# Altium PCB PCBcheck.PcbDoc
Units mm, origin at the board's own origin, x right, y up, seen from the top; angles counter-clockwise.
Board outline 50.8 x 74.93 mm, 2 copper layers (Top Layer, Bottom Layer); 23 components, 19 nets, 92 pads, 0 vias.
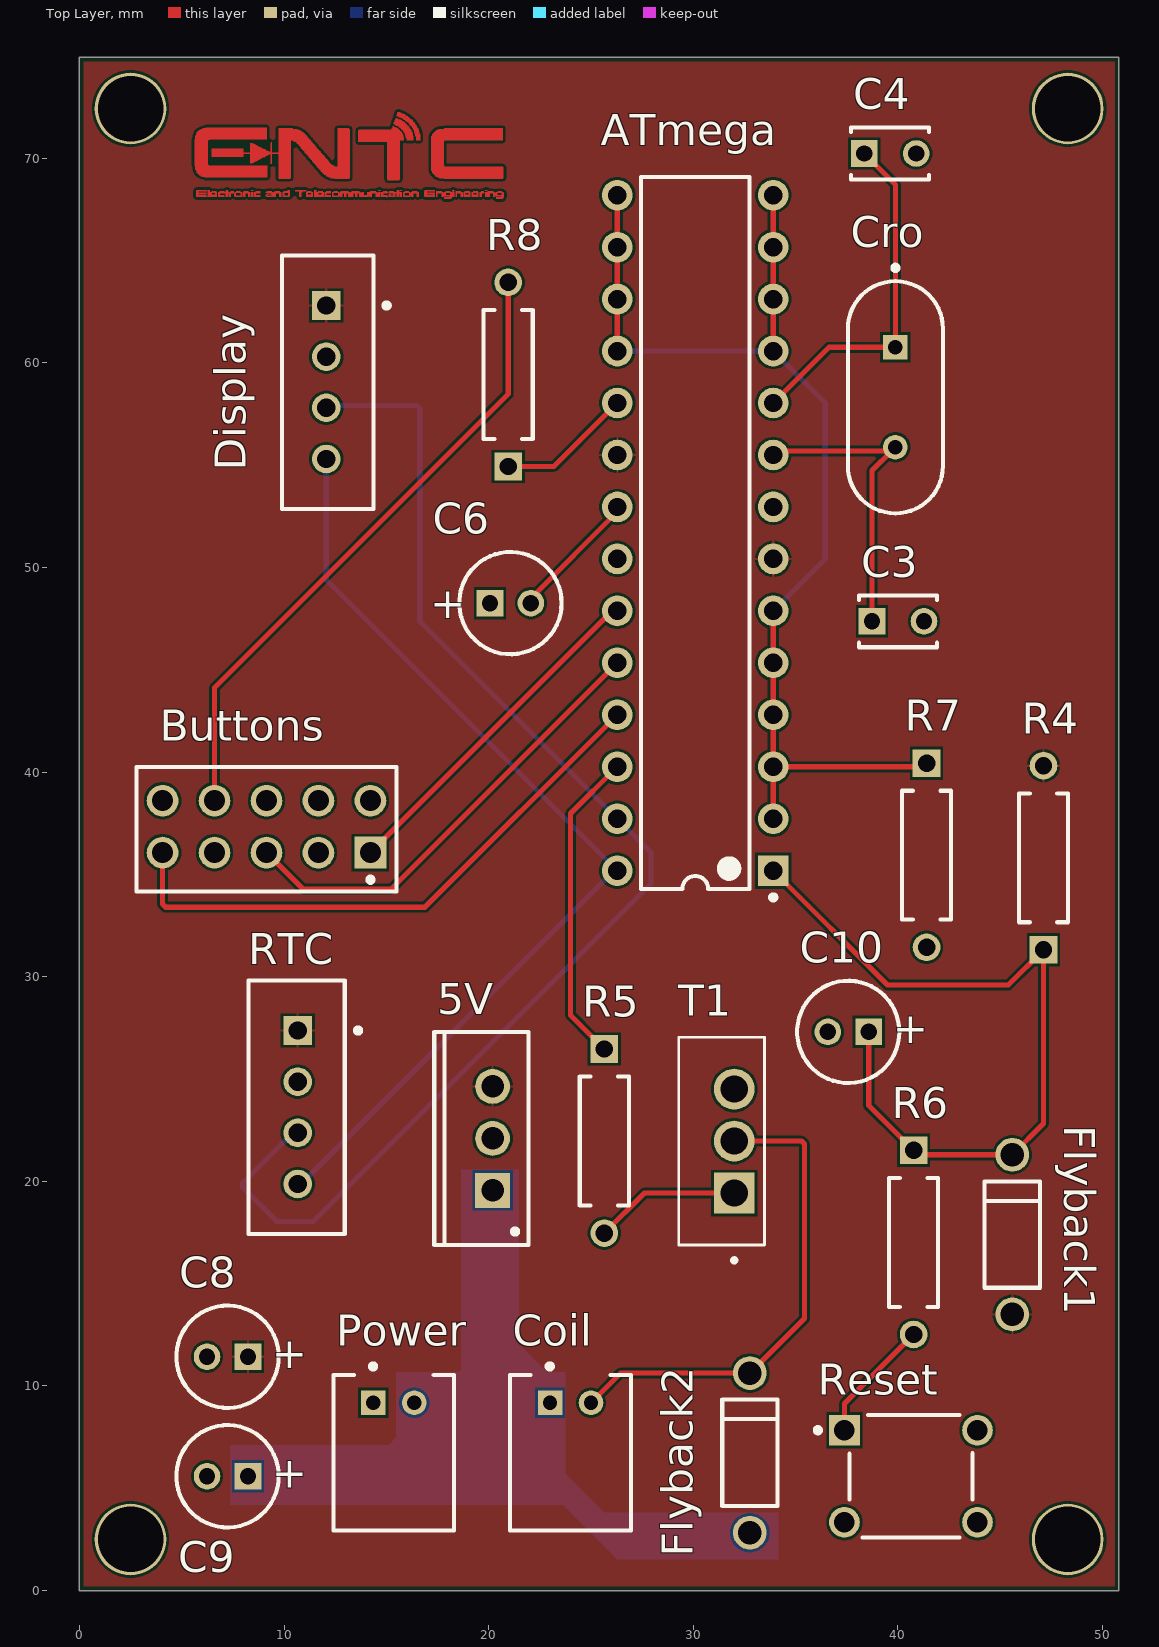
[diagram p0: Top Layer view]
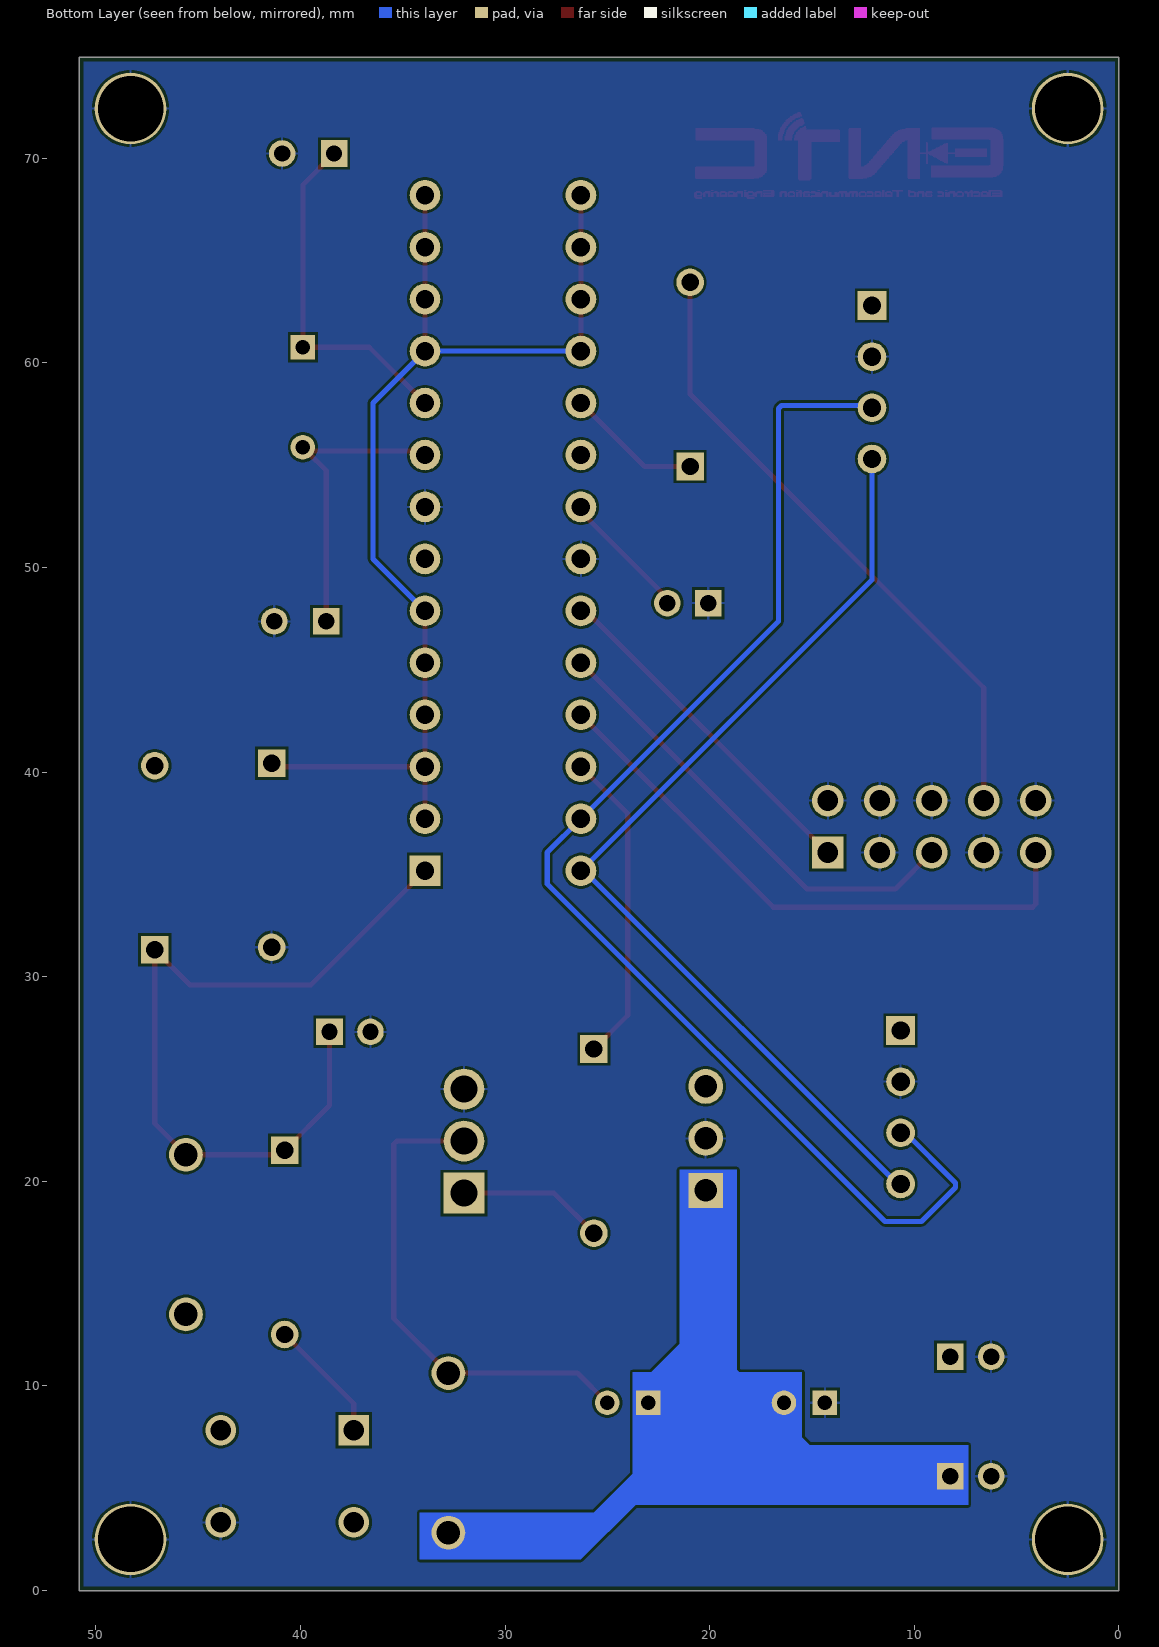
[diagram p1: Bottom Layer view, seen from below]

## Layer stack, top to bottom
Top Solder: solder mask 0.0102, Solder Resist, Dk 3.5
Top Layer: signal copper 0.0356
Dielectric 1: dielectric 0.32, FR-4, Dk 4.8
Bottom Layer: signal copper 0.0356
Bottom Solder: solder mask 0.0102, Solder Resist, Dk 3.5

## Board outline
0,0 50.8,0 50.8,74.93 0,74.93

## Design rules (kind name [scope] priority, off if disabled: settings)
BoardOutlineClearance [All] p1: gap=0.2 ignorepadtopadclearanceinfootprint=FALSE
Clearance [All] p1: gap=0.127 ignorepadtopadclearanceinfootprint=FALSE except(0.25: Arc-Hole Track-Hole SMDPad-Hole THPad-Hole Via-Hole Fill-Hole Poly-Hole Region-Hole Text-Hole)
ComponentClearance [All] p1: gap=0.127 collisioncheckmode=3 verticalgap=0.127 showdistances=TRUE
DiffPairsRouting [All] p1: maxlimit=0.254 minlimit=0.127 mostfreqgap=0.127 toplayer_minwidth=0.127 toplayer_maxwidth=25.4 toplayer_prefwidth=0.127 bottomlayer_minwidth=0.127 bottomlayer_maxwidth=25.4 bottomlayer_prefwidth=0.127 maxuncoupledlength=12.7
Height [All] p1: minheight=0 maxheight=1816.048 prefheight=12.7
HoleSize [All] p1: absolutevalues=TRUE maxlimit=6.3 minlimit=0.3 maxpercent=80.000 minpercent=20.000
HoleToHoleClearance [All] p1: gap=0.25 allowstackedmicrovias=FALSE
MinimumAnnularRing [All] p1: minimumring=0.076
MinimumSolderMaskSliver [All] p1: minsoldermaskwidth=0
PlaneClearance [All] p1: clearance=0.127
PlaneConnect PlaneConnectPowerPads [InPadClass('PowerPads')] p1: planeconnectstyle=Direct reliefexpansion=0.508 reliefentries=4 reliefconductorwidth=0.254 reliefairgap=0.254
PlaneConnect [All] p2: pad.planeconnectstyle=Relief pad.reliefexpansion=0.3 pad.reliefentries=4 pad.reliefconductorwidth=0.127 pad.reliefairgap=0.127 via.planeconnectstyle=Direct via.reliefexpansion=0.3 via.reliefentries=4 via.reliefconductorwidth=0.127 via.reliefairgap=0.127
PolygonConnect PolygonConnectPowerPads [All vs (InPadClass('PowerPads'))] p1: connectstyle=Direct reliefconductorwidth=0.254 reliefentries=4 polygonreliefangle="90 Angle" airgapwidth=0.254
PolygonConnect [All] p2: thpad.connectstyle=Relief thpad.reliefconductorwidth=0.127 thpad.reliefentries=4 thpad.polygonreliefangle="90 Angle" thpad.airgapwidth=0.127 smdpad.connectstyle=Relief smdpad.reliefconductorwidth=0.127 smdpad.reliefentries=4 smdpad.polygonreliefangle="90 Angle" smdpad.airgapwidth=0.127 via.connectstyle=Direct via.reliefconductorwidth=0.127 via.reliefentries=4 via.polygonreliefangle="90 Angle" via.airgapwidth=0.127
RoutingVias [All] p1: holewidth=0.3 width=0.6 viastyle="Through Hole" minholewidth=0.3 minwidth=0.6 maxholewidth=0.6 maxwidth=6.6
SilkToSilkClearance [All] p1: silktosilkclearance=0
SilkToSolderMaskClearance [IsPad] p1: minsilkscreentomaskgap=0.127 clearancetoexposedcopper=TRUE
SolderMaskExpansion [All] p1: expansion=0.075 istentingtop=FALSE
Width [All] p1: maxlimit=25.4 minlimit=0.127 preferedwidth=0.127 minimp=50.000000 maximp=50.000000 favimp=50.000000
20 further rules are at their usual default settings.

## Components (designator, comment, footprint, x,y, rotation, side; value= is the part's Value field where it differs from the comment)
5V "L7805CV" TO220 20.193,22.098 r90 top
ATmega "ATMEGA328P-PU" ATML-28P3 30.099,51.689 r180 top
Buttons "68021-210HLF" FCI-68021-210HLF-10_V 9.144,37.338 r180 top
C3 "22pF" KEMT-C315-THT-2 40.005,47.371 r0 top
C4 "22pF" KEMT-C315-THT-2 39.624,70.231 r0 top
C6 "ECA1HM100" CAPPR55-200-1100X500X1200 21.066,48.26 r0 top value=10µF
C8 "ECA1HM100" CAPPR55-200-1100X500X1200 7.239,11.43 r180 top value=10µF
C9 "ECA1HM100" CAPPR55-200-1100X500X1200 7.239,5.588 r180 top value=10µF
C10 "ECA1HM100" CAPPR55-200-1100X500X1200 37.576,27.305 r180 top value=10µF
Coil "S2B-PH-K-S(LF)(SN)" JST-S2B-PH-K-S_V 24.003,6.731 r0 top
Cro "FOXSLF/160-20" FOX-FOXSLF160-20 39.878,58.32 r270 top
Display "S4B-XH-A(LF)(SN)" JST-S4B-XH-A(LF)(SN)_V 12.065,59.055 r270 top
Flyback1 "1N4007" FAIR-DO-41-2 45.593,17.399 r90 top
Flyback2 "1N4007" FAIR-DO-41-2 32.766,6.731 r90 top
Power "S2B-PH-K-S(LF)(SN)" JST-S2B-PH-K-S_V 15.367,6.731 r0 top
R4 "MFR-25FBF52-10K" RESA60-630X240 47.117,35.814 r90 top value=10k
R5 "MFR-25FBF52-1K" RESA60-630X240 25.654,21.971 r270 top value=1k
R6 "MFR-25FBF52-221R" RESA60-630X240 40.767,17.018 r270 top value=221
R7 "MFR-25FBF52-10K" RESA60-630X240 41.402,35.941 r270 top value=10k
R8 "MFR-25FBF52-221R" RESA60-630X240 20.955,59.436 r90 top value=221
Reset "B3F-1000" OMRON-B3F-1000-4_V 40.64,5.588 r0 top
RTC "S4B-XH-A(LF)(SN)" JST-S4B-XH-A(LF)(SN)_V 10.668,23.622 r270 top
T1 "IRFZ44N" TO254P1016X419X2286-3 32.004,21.971 r90 top

## Footprints (in the part's own frame and the unit in brackets; to place one, negate y for a bottom-side part, rotate by r counter-clockwise, add the part's x,y. Pads: shape width x height; smd on the part's side, far side on the other; paste and mask are expansions set on the pad)
ATML-28P3 [mm] "DIP, 28-Leads, Body 34.8x7.2mm, Pitch 2.54mm"
  rect 1.5x1.5 hole 0.9: 1(-3.81,16.51)
  round 1.5 hole 0.9: 2(-3.81,13.97) 3(-3.81,11.43) 4(-3.81,8.89) 5(-3.81,6.35) 6(-3.81,3.81) 7(-3.81,1.27) 8(-3.81,-1.27) 9(-3.81,-3.81) 10(-3.81,-6.35) 11(-3.81,-8.89) 12(-3.81,-11.43) 13(-3.81,-13.97) 14(-3.81,-16.51) 15(3.81,-16.51) 16(3.81,-13.97) 17(3.81,-11.43) 18(3.81,-8.89) 19(3.81,-6.35) 20(3.81,-3.81) 21(3.81,-1.27) 22(3.81,1.27) 23(3.81,3.81) 24(3.81,6.35) 25(3.81,8.89) 26(3.81,11.43) 27(3.81,13.97) 28(3.81,16.51)
  silkscreen extent -3.94,-17.4 2.65,17.93, body extent -3.95,-17.4 3.95,17.4, height 4.58
CAPPR55-200-1100X500X1200 [mm] "THD, 2-Leads, Dia 5mm, Pin Spacing 2mm"
  rect 1.3x1.3 hole 0.8: 1(-1,0)
  round 1.3 hole 0.8: 2(1,0)
  silkscreen extent -2.5,-2.5 2.5,2.5, body extent -2.5,-2.5 2.45,2.5, height 12
FAIR-DO-41-2 [mm] "THD, 2-Leads, Body 5.2x2.72mm, Pin Spacing 7.8mm"
  round 1.65 hole 1.15: 1(-3.9,0) 2(3.9,0)
  silkscreen extent -2.6,-1.35 2.6,1.35, body extent -4.29,-1.17 4.29,1.17, height 2.35
FCI-68021-210HLF-10_V [mm] "THD, 10-Leads, Body 12.7x2.54mm, Pitch 2.54mm"
  rect 1.55x1.55 hole 1.02: 1(-5.08,1.27)
  round 1.55 hole 1.02: 2(-2.54,1.27) 3(0,1.27) 4(2.54,1.27) 5(5.08,1.27) 6(5.08,-1.27) 7(2.54,-1.27) 8(0,-1.27) 9(-2.54,-1.27) 10(-5.08,-1.27)
  silkscreen extent -6.35,-2.92 6.35,3.18, body extent -6.32,-11.13 6.32,1.64, height 4.83
FOX-FOXSLF160-20 [mm] "THD, 2-Leads, Body 11.35x4.65mm"
  rect 1.2x1.2 hole 0.7: 1(-2.44,0)
  round 1.2 hole 0.7: 2(2.44,0)
  silkscreen extent -6.45,-2.32 5.67,2.32, body extent -5.68,-2.33 5.68,2.33, height 3.6
JST-S2B-PH-K-S_V [mm] "THD, 2-Leads, Body 7.6x5.9mm, Pitch 2mm"
  rect 1.2x1.2 hole 0.7: 1(-1,2.45)
  round 1.2 hole 0.7: 2(1,2.45)
  silkscreen extent -2.95,-3.8 2.95,4.35, body extent -2.95,-3.8 2.95,3.8, height 4.8
JST-S4B-XH-A(LF)(SN)_V [mm] "Header, 4-Leads, Body 12.4x11.5mm, Pitch 2.5mm"
  rect 1.4x1.4 hole 0.9: 1(-3.75,0)
  round 1.4 hole 0.9: 2(-1.25,0) 3(1.25,0) 4(3.75,0)
  silkscreen extent -6.2,-2.16 6.2,3.08, body extent -6.2,-9.2 6.2,2.3, height 6.15
KEMT-C315-THT-2 [mm] "THD, 2-Leads, Body 3.81x2.54mm"
  rect 1.3x1.3 hole 0.8: 1(-1.27,0)
  round 1.3 hole 0.8: 2(1.27,0)
  silkscreen extent -1.91,-1.27 1.91,1.27, body extent -1.91,-1.27 1.91,1.27, height 4.66
OMRON-B3F-1000-4_V [mm] "TH, 4-Leads, Body 6x6mm"
  rect 1.5x1.5 hole 1 paste+0: 1(-3.25,2.25)
  round 1.5 hole 1 paste+0: 2(3.25,2.25) 4(3.25,-2.25)
  round 1.5 hole 1 paste+0 mask+0.102: 3(-3.25,-2.25)
  silkscreen extent -4.67,-3 3,3, body extent -3.4,-3 3.4,3, height 4.5
RESA60-630X240 [mm] "Axial Resistor, 2-Leads, Dia 2.4mm, Body Length 6.3mm"
  rect 1.35x1.35 hole 0.85: 1(-4.5,0)
  round 1.35 hole 0.85: 2(4.5,0)
  silkscreen extent -3.15,-1.2 3.15,1.2, body extent -4.77,-1.19 4.77,1.2, height 2.4
TO220 [mm] "TO, Thru-Hole, Vertical, Heatsink Mounted; 3 In-Line Leads; Pitch 2.54 mm"
  rect 1.7x1.7 hole 1.1: 1(-2.54,0)
  round 1.7 hole 1.1: 2(0,0) 3(2.54,0)
  silkscreen extent -5.2,-1.75 5.2,2.85, body extent -5.25,-1.8 5.25,2.9, height 19.7
TO254P1016X419X2286-3 [mm]
  rect 1.995x1.995 / inner round 1.995 / far side rect 1.995x1.995 hole 1.33: 1(-2.54,0)
  round 1.995 hole 1.33: 2(0,0) 3(2.54,0)
  silkscreen extent -5.93,-1.48 5.08,2.72, body extent -5.08,-1.47 5.08,2.72, height 22.86

## Part data
5V: library part CMP-019-00018-3, "Positive Voltage Regulator IC, 1.5 A, 5 V, 0 to 125 degC, 3-Pin TO-220, RoHS, Tube", Case/Package=TO-220, Dropout Voltage=2V, Manufacturer=STMicroelectronics, Max Input Voltage=35V, Max Operating Temperature=125°C, Max Ouput Current=1.5A, Max Supply Voltage=20V, Min Input Voltage=7V, Min Operating Temperature=0°C, Min Supply Voltage=8V, Nominal Output Voltage=5V, Package Quantity=50, Datasheet URL=https://datasheet.ciiva.com/15111/getdatasheetpartid-44136-15111027.pdf, Datasheet Version="Rev 30, 09/2012", Manufacturer URL=http://www.st.com/, Mounting Technology=TH, Output Current=1.5A, Output Voltage=5V, Outputs=1, Packaging=Rail/Tube, Pins=3, RoHS Compliant=True
ATmega: library part CMP-020-00004-3, "8-Bit Microcontroller with 32 KBytes In-System Programmable Flash, 23 I/Os, -40 to 85 degC, 28-Pin PDIP (28P3), RoHS, Tube", Case/Package=DIP, Manufacturer=Atmel, Max Clock Frequency=20MHz, Max Operating Temperature=85°C, Max Supply Voltage=5.5V, Min Operating Temperature=-40°C, Min Supply Voltage=1.8V, Package Description="28-Pin Plastic Dual Inline Package, Body 34.671 x 7.3025 mm, Pitch 2.54 mm", Package Quantity=14, Package Reference=28P3, Package Version="Rev. B, 09/2001", Datasheet URL=http://www.atmel.com/images/Atmel-8271-8-bit-AVR-Microcontroller-ATmega48A-48PA-88A-88PA-168A-168PA-328-328P_datasheet_Complete.pdf, Datasheet Version="Rev. 8271J, 11/2015", Density=32KB, Ethernet Channels=0, I/Os=23, Interface=USART, Manufacturer URL=http://www.atmel.com/, Mounting Technology=TH, Package URL=http://www.atmel.com/images/Atmel-8271-8-bit-AVR-Microcontroller-ATmega48A-48PA-88A-88PA-168A-168PA-328-328P_datasheet_Complete.pdf, Packaging=Rail/Tube, Pins=28, RAM Size=2KB, RoHS Compliant=True
Buttons: library part CMP-002-00020-2, "Male Header, Pitch 2.54 mm, 2 x 5 Position, Height 4.83 mm, Tail Length 3.05 mm, Bulk", Case/Package=68021-210HLF-10, Manufacturer="FCI Electronics", Package Description="Male Header, Pitch 2.54 mm, 2 x 5 Position, Height 4.83 mm, Tail Length 3.05 mm", Connector Type=Header, Datasheet URL=http://portal.fciconnect.com/Comergent//fci/drawing/68020.pdf, Datasheet Version="Rev. BM, 04/2015", Gender=Male, Manufacturer URL=http://portal.fciconnect.com/, Mounting Technology=TH, Package Reference=68021-210HLF-10, RoHS Compliant=Unknown
C3 C4: library part CMP-1664-00008-1, "Capacitor, Ceramic, 22 pF, +/-10 %, 100 V, -55 to 125 degC, 2-Pin THD, RoHS, Bulk", Case\Package=TO-220, Max Input Voltage="40 V", Max Operating Temperature="125 degC", Max Ouput Current="1.5 A", Min Input Voltage="4.2 V", Min Operating Temperature="0 degC", Output Voltage="1.2 V", Package Quantity=50, ComponentLink1Description="Manufacturer URL", ComponentLink1URL=http://www.kemet.com/, ComponentLink2Description=Datasheet, ComponentLink2URL=http://capacitoredge.kemet.com/capedge2/DataSheet/Datasheet-C315C220K1G5TA.pdf?pn=C315C220K1G5TA{BULK}, DatasheetVersion=Aug-16, Height="9.28 mm", Length="10.28 mm", Mount="Through Hole", Output Current="1.5 A", Outputs=1, PackageDescription="2-Pin Through Hole Device, Body 3.81 x 2.54 mm", PackageReference=C315-THT-2, Packaging=Rail/Tube, Pins=3, Radiation Hardening=No, REACH SVHC="No SVHC", RoHSCompliant=true, Weight="0.08113 oz", Width="4.82 mm"
C6 C8 C9 C10: library part CMP-001-00025-7, "Aluminum Electrolytic Capacitor, 10 uF, +/- 20%, 50 V, -40 to 85 degC, 2-Pin THD, RoHS, Bulk", Capacitor Type=Electrolytic, Case/Package=Radial, Manufacturer=Panasonic, Max Operating Temperature=85°C, Min Operating Temperature=-40°C, Package Description="2-Pin Radial Lead, Dia 5 mm, Height 12 mm", Package Quantity=200, Package Reference=CAPPR55-200-1100X500X1200, Ripple Current=65mA, Tolerance=20%, Voltage Rating=50V, Datasheet URL=https://industrial.panasonic.com/cdbs/www-data/pdf/RDF0000/ABA0000C1218.pdf, Datasheet Version="Rev. 05, 10/2016", Diameter=5mm, Lead Pitch=2mm, Manufacturer URL=http://www.panasonic.com/, Mounting Technology=TH, Packaging=Bulk, Pins=2, Ripple Current (AC)=65mA, RoHS Compliant=True
Coil Power: library part CMP-002-00030-2, "Male Header, Pitch 2 mm, 1 x 2 Position, Height 4.8 mm, Tail Length 3.4 mm, -25 to 85 degC, RoHS, Bulk", Case/Package=S2B-PH-K-S, Manufacturer="Japan Solderless Terminals", Max Operating Temperature=85°C, Min Operating Temperature=-25°C, Package Description="Male Header, Pitch 2 mm, 1 x 2 Position, Height 4.8 mm, Tail Length 3.4 mm", Connector Type=Header, Datasheet URL=http://www.jst-mfg.com/product/pdf/eng/ePH.pdf, Datasheet Version=Dec-12, Gender=Male, Mounting Technology=SM, Package Reference=S2B-PH-K-S, RoHS Compliant=Unknown
Cro: library part CMP-003-00027-2, "Resistance Weld Thru-Hole Crystal, 16 MHz, +/- 30 ppm, 20 pF, -20 to 70 degC, 2-Pin THD, RoHS, Bulk", Case/Package=FOXSLF160-20, Frequency=16MHz, Frequency Tolerance=30ppm, Load Capacitance=20pF, Manufacturer="FOX Electronics", Max Operating Temperature=70°C, Min Operating Temperature=-20°C, Package Description="2-Pin Through Hole Device, Body 11.35 x 4.65 mm", Package Quantity=100, Resistance=40Ohm, Tolerance=50ppm, Datasheet URL=http://www.foxonline.com/pdfs/hc49slf.pdf, Datasheet Version=Mar-15, ESR=40, Manufacturer URL=http://www.foxonline.com/, Mounting Technology=TH, Package Reference=FOXSLF160-20, Packaging=Bulk, Pins=2, RoHS Compliant=True
Display RTC: library part CMP-002-00034-2, "Male Header, Pitch 2.5 mm, 1 x 4 Position, Height 6.1 mm, Tail Length 3.4 mm, -25 to 85 degC, RoHS, Bulk", Manufacturer=JST, Max Operating Temperature=85°C, Min Operating Temperature=-25°C, Package Description="XH Series Disconnectable Crimp Style Connector, Pitch 2.5 mm, 1 x 4 Position, Height 6.1 mm, Tail Length 3.4 mm", Case/Package=S4B-XH-A(LF)(SN), Connector Type=Header, Datasheet URL=http://www.jst-mfg.com/product/pdf/eng/eXH.pdf, Datasheet Version=May-16, Gender=Male, Manufacturer URL=http://www.jst.com/home2.html, Mounting Technology=TH, Package Reference=S4B-XH-A(LF)(SN), RoHS Compliant=Unknown
Flyback1 Flyback2: library part CMP-004-00007-2, "General Purpose Rectifier, 1.1 V, 1.0 A, -55 to 175 degC, 2-Pin DO-41, RoHS, Tape and Reel", Case/Package=DO-41-2, Forward Current=1A, Forward Voltage=1.1V, Manufacturer=Fairchild, Max Operating Temperature=175°C, Max Surge Current=30A, Min Operating Temperature=-55°C, Package Description="2-Pin Axial Lead, Dia 2.375 mm, Body Length 4.63 mm", Package Quantity=5000, Package Version="Rev. 2, 09/2008", Peak Reverse Current=5uA, Datasheet URL=https://www.fairchildsemi.com/datasheets/1N/1N4007.pdf, Datasheet Version="Rev. 1.1.0, 11/2014", Elements=1, Manufacturer URL=https://www.fairchildsemi.com/, Mounting Technology=TH, Package Reference=DO-41-2, Package URL=http://www.fairchildsemi.com/dwg/DO/DO41A.pdf, Packaging=TapeandReel, Pins=2, RoHS Compliant=True
R4 R7: library part CMP-009-00047-4, "Axial Resistor, 10 KOhm, +/- 1%, 0.25 W, -55 to 155 degC, 2-Pin THD, RoHS, Bulk", Case/Package=Axial, Manufacturer=Yageo, Max Operating Temperature=155°C, Min Operating Temperature=-55°C, Package Description="2-Pin Axial Lead, Dia 2.4 mm, Body Length 6.3 mm", Package Quantity=200, Package Reference=MFR-25, Power=250mW, Tolerance=1%, Voltage Rating=250V, Datasheet URL=http://www.yageo.com/documents/recent/Yageo%20LR_MFR_2013.pdf, Datasheet Version=Apr-13, Manufacturer URL=http://www.yageo.com/, Mounting Technology=TH, Packaging=Bulk, RoHS Compliant=True
R5: library part CMP-009-00048-4, "Axial Resistor, 1 KOhm, +/- 1%, 250 mW, -55 to 155 degC, 2-Pin THD, RoHS, Bulk", Case/Package=Axial, Manufacturer=Yageo, Max Operating Temperature=155°C, Min Operating Temperature=-55°C, Package Description="2-Pin Axial Lead, Dia 2.4 mm, Body Length 6.3 mm", Package Quantity=200, Package Reference=MFR-25, Power=250mW, Tolerance=1%, Voltage Rating=250V, Composition=CarbonFilm, Datasheet URL=http://www.yageo.com/documents/recent/Yageo%20LR_MFR_2013.pdf, Datasheet Version=Apr-13, Manufacturer URL=http://www.yageo.com/, Mounting Technology=TH, Packaging=Bulk, RoHS Compliant=True
R6 R8: library part CMP-009-00051-4, "Axial Resistor, 221 Ohm, +/- 1%, 250 mW, -55 to 155 degC, 2-Pin THD, RoHS, Bulk", Case/Package=Axial, Manufacturer=Yageo, Max Operating Temperature=155°C, Min Operating Temperature=-55°C, Package Description="2-Pin Axial Lead, Dia 2.4 mm, Body Length 6.3 mm", Package Quantity=200, Package Reference=MFR-25, Power=250mW, Tolerance=1%, Voltage Rating=250V, Datasheet URL=http://www.yageo.com/documents/recent/Yageo%20LR_MFR_2013.pdf, Datasheet Version=Apr-13, Manufacturer URL=http://www.yageo.com/, Mounting Technology=TH, Packaging=Bulk, RoHS Compliant=True
Reset: library part CMP-011-00004-2, "Tactile Switch, SPST-NO, 0.05 A, 24 V, -25 to 70 degC, 4-Pin THD, RoHS, Bulk", Contact Current Rating=50mA, Manufacturer="Omron Electronic Components", Max Contact Resistance=100mohm, Max Operating Temperature=70°C, Max Voltage Rating (DC)=24V, Min Operating Temperature=-25°C, Operating Force=100gf, Package Description="4-Pin Through Hole Device, Body 6 x 6 mm", Package Quantity=1500, Resistance=0.1Ohm, Case/Package=B3F-1000, Contact Material=Gold, Contact Plating=Gold, Current Rating=50mA, Datasheet URL=http://www.omron.com/ecb/products/pdf/en-b3f.pdf, Datasheet Version=Jan-15, Manufacturer URL=http://www.omron.com/, Max Current Rating=50mA, Mounting Technology=TH, Package Reference=B3F-1000, Packaging=Bulk, Pins=4, RoHS Compliant=True, Throw Configuration=SPST, Voltage Rating=24V, Voltage Rating (DC)=24V
T1: library part CMP-007-000000-1, "N-Channel 55 V 49A (Tc) 94W (Tc) Through Hole TO-220AB", Package="TO-220-3 Infineon", Availability="In Stock", Check_prices=https://www.snapeda.com/parts/IRFZ44N/Infineon+Technologies/view-part/?ref=eda, Component Type=Standard, Design Item ID=IRFZ44N, MF="Infineon Technologies", MP=IRFZ44N, Pin Count=3, Price=None, Purchase-URL=https://pricing.snapeda.com/search/part/IRFZ44N/?ref=eda, SnapEDA_Link=https://www.snapeda.com/parts/IRFZ44N/Infineon+Technologies/view-part/?ref=snap, Source=IRFZ44N.SchLib

## Free pads (board coordinates)
  round 3.5 hole 3.2: 1(2.5,2.5) 1(2.5,72.43) 1(48.3,2.5) 1(48.3,72.43)

## Nets (pads, with @x,y where several pads share a name; then routed paths per layer and width w, separated by ;. In a path a pad name is that pad's centre, name@x,y a point inside that pad or via, vN(x,y) a via of type N, cw(c..) or ccw(c..) an arc to the next point about the centre after c; other vN are vias at no path point)
+5: 5V.3 ATmega.7 ATmega.20 C8.1 Display.1 Flyback1.1 R4.2 RTC.1
+12: 5V.1 C9.1 Coil.1 Flyback2.1 Power.2
Alarm: ATmega.25 Buttons.5 | length 28.7
  Top Layer w0.254: Buttons.5 4.064,33.55 4.213,33.401 16.891,33.401 ATmega.25
"Control Signal": ATmega.26 R5.1 | length 15.4
  Top Layer w0.254: R5.1 24.003,28.122 24.003,37.973 ATmega.26
GND: 5V.2 ATmega.8 ATmega.22 Buttons.2 Buttons.4 Buttons.6 Buttons.8 Buttons.9 Buttons.10 C3.2 C4.2 C6.1 C8.2 C9.2 C10.2 Display.2 pad.1 Power.1 R7.2 Reset.4 RTC.2 T1.3
Hours: ATmega.23 Buttons.1 | length 17
  Top Layer w0.254: Buttons.1 26.035,47.879 ATmega.23
LED: Buttons.7 R8.2 | length 31.3
  Top Layer w0.254: Buttons.7 6.604,44.124 20.955,58.475 R8.2
Minutes: ATmega.24 Buttons.3 | length 22.5
  Top Layer w0.254: Buttons.3 10.922,34.29 15.24,34.29 ATmega.24
NetATmega_2: ATmega.2 ATmega.3 ATmega.4 ATmega.5 ATmega.6 ATmega.11 ATmega.12 ATmega.13 ATmega.14 ATmega.15 ATmega.16 ATmega.17 ATmega.18 R7.1 | length 55.4
  Top Layer w0.254: ATmega.18 ATmega.17 ATmega.16 ATmega.15 ; ATmega.2 ATmega.3 ; ATmega.6 ATmega.5 ATmega.4 ATmega.3 ; ATmega.11 ATmega.12 ATmega.13 ATmega.14 ; R7.1 41.22,40.259 ATmega.3
  Bottom Layer w0.254: ATmega.18 ATmega.11 36.449,58.039 36.449,50.419 ATmega.6
NetATmega_9: ATmega.9 C3.1 Cro.2 | length 14.9
  Top Layer w0.254: ATmega.9 34.109,55.699 Cro.2@39.697,55.699 ; C3.1 38.735,54.737 Cro.2@39.697,55.699 ; Cro.2 Cro.2@39.697,55.699
NetATmega_10: ATmega.10 C4.1 Cro.1 | length 17.2
  Top Layer w0.254: ATmega.10 36.63,60.76 Cro.1 39.878,68.707 C4.1
NetATmega_21: ATmega.21 C6.2 | length 6.4
  Top Layer w0.254: C6.2 22.066,48.498 26.289,52.721 ATmega.21
NetCoil_2: Coil.2 Flyback2.2 T1.2 | length 24.2
  Top Layer w0.254: Coil.2 26.453,10.631 Flyback2.2 35.433,13.298 35.433,21.822 35.284,21.971 T1.2
NetR5_2: R5.2 T1.1 | length 7.2
  Top Layer w0.254: R5.2 27.614,19.431 T1.1
NetR6_2: R6.2 Reset.1 | length 6.1
  Top Layer w0.254: Reset.1 37.39,9.141 R6.2
ON: ATmega.19 R8.1 | length 6.6
  Top Layer w0.254: R8.1 23.186,54.936 ATmega.19
Reset: ATmega.1 C10.1 Flyback1.2 R4.1 R6.1 | length 38.5
  Top Layer w0.254: ATmega.1 39.497,29.591 45.394,29.591 R4.1 47.117,22.823 Flyback1.2 40.986,21.299 R6.1 38.576,23.709 C10.1
SCL: ATmega.28 Display.4 RTC.4 | length 48
  Bottom Layer w0.254: RTC.4 10.825,19.872 26.132,35.179 ATmega.28 12.065,49.403 Display.4
SDA: ATmega.27 Display.3 RTC.3 | length 64.1
  Bottom Layer w0.254: RTC.3@10.805,22.372 RTC.3 10.434,22.372 7.979,19.917 7.979,19.707 9.652,18.034 11.43,18.034 27.94,34.544 27.94,36.068 ATmega.27 16.637,47.371 16.637,57.763 16.488,57.912 12.172,57.912 Display.3
pads on no net: Reset.2 Reset.3

## Polygon pours and split planes (outlines as drawn)
GND on Bottom Layer "GND_L02_P003" (solid, pour order 3): 0,0 50.8,0 50.8,74.93 0,74.93
+5 on Top Layer "bottom layer-GND" (solid, pour order 1): 0.127,74.93 50.546,74.93 50.8,74.676 50.8,0 -0.127,0

## Other copper
Top Layer:
  region: 19.925,68.412 19.827,68.412 19.827,68.445 19.925,68.445
  region: 14.682,68.445 14.715,68.445 14.715,68.412 14.617,68.412 14.617,68.445 14.65,68.445
  region: 8.424,68.412 8.391,68.412 8.391,68.445 8.49,68.445 8.49,68.412 8.457,68.412
  region: 15.665,68.412 15.665,68.445 15.764,68.445 15.764,68.412 15.698,68.412
  region: 18.319,68.412 18.221,68.412 18.221,68.445 18.319,68.445
  region: 18.221,68.118 18.221,68.347 18.254,68.347 18.254,68.38 18.287,68.38 18.287,68.347 18.319,68.347 18.319,68.118 18.254,68.118
  region: 19.827,68.281 19.827,68.347 19.925,68.347 19.925,68.118 19.827,68.118 19.827,68.249
  region: 16.419,68.281 16.321,68.281 16.321,68.118 16.222,68.118 16.222,68.347 16.255,68.347 16.255,68.38 16.517,68.38 16.517,68.347 16.583,68.347 16.583,68.118 16.485,68.118 16.485,68.281 16.452,68.281
  region: 6.262,68.281 6.262,68.445 6.36,68.445 6.36,68.118 6.262,68.118 6.262,68.249
  region: 18.385,68.118 18.385,68.38 18.647,68.38 18.647,68.347 18.713,68.347 18.713,68.314 18.745,68.314 18.745,68.118 18.647,68.118 18.647,68.281 18.451,68.281 18.451,68.118 18.418,68.118
  region: 14.617,68.249 14.617,68.347 14.715,68.347 14.715,68.118 14.617,68.118 14.617,68.216
  region: 16.091,68.347 16.157,68.347 16.157,68.314 16.19,68.314 16.19,68.15 16.157,68.15 16.157,68.118 15.829,68.118 15.829,68.347 15.895,68.347 15.895,68.38 16.091,68.38 hole: 16.091,68.281 15.928,68.281 15.928,68.249 15.895,68.249 15.895,68.216 15.928,68.216 15.928,68.183 16.091,68.183 16.091,68.216 16.091,68.249
  region: 19.597,68.118 19.565,68.118 19.565,68.347 19.63,68.347 19.63,68.38 19.761,68.38 19.761,68.347 19.794,68.347 19.794,68.314 19.761,68.314 19.761,68.281 19.663,68.281 19.663,68.118 19.63,68.118
  region: 18.123,68.347 18.188,68.347 18.188,68.052 18.156,68.052 18.156,68.019 17.828,68.019 17.828,68.085 18.09,68.085 18.09,68.15 17.828,68.15 17.828,68.347 17.894,68.347 17.894,68.38 18.123,68.38 hole: 18.09,68.281 17.926,68.281 17.926,68.216 18.09,68.216 18.09,68.249
  region: 8.457,68.347 8.49,68.347 8.49,68.118 8.391,68.118 8.391,68.347 8.424,68.347
  region: 7.408,68.15 7.408,68.118 7.31,68.118 7.31,68.314 7.343,68.314 7.343,68.347 7.408,68.347 7.408,68.38 7.539,68.38 7.539,68.281 7.408,68.281 7.408,68.183
  region: 9.768,68.216 9.768,68.281 9.604,68.281 9.604,68.118 9.505,68.118 9.505,68.347 9.538,68.347 9.538,68.38 9.8,68.38 9.8,68.347 9.866,68.347 9.866,68.118 9.768,68.118 9.768,68.183
  region: 12.618,68.347 12.684,68.347 12.684,68.314 12.717,68.314 12.717,68.15 12.684,68.15 12.684,68.118 12.356,68.118 12.356,68.347 12.422,68.347 12.422,68.38 12.618,68.38 hole: 12.618,68.281 12.422,68.281 12.422,68.183 12.618,68.183 12.618,68.216 12.618,68.249
  region: 10.292,68.15 10.259,68.15 10.259,68.118 9.931,68.118 9.931,68.347 9.997,68.347 9.997,68.38 10.194,68.38 10.194,68.445 10.292,68.445 hole: 10.194,68.281 10.03,68.281 10.03,68.249 10.03,68.216 10.03,68.183 10.194,68.183
  region: 11.471,68.412 11.471,68.445 11.57,68.445 11.57,68.118 11.471,68.118 11.471,68.38
  region: 7.867,68.347 7.933,68.347 7.933,68.314 7.965,68.314 7.965,68.15 7.933,68.15 7.933,68.118 7.605,68.118 7.605,68.15 7.572,68.15 7.572,68.314 7.605,68.314 7.605,68.347 7.671,68.347 7.671,68.38 7.867,68.38 hole: 7.867,68.281 7.671,68.281 7.671,68.183 7.867,68.183
  region: 19.073,68.347 19.106,68.347 19.106,68.216 18.877,68.216 18.877,68.183 19.106,68.183 19.106,68.118 18.778,68.118 18.778,68.249 18.778,68.281 18.778,68.347 18.844,68.347 18.844,68.38 19.073,68.38 hole: 19.008,68.281 18.877,68.281 18.877,68.249 19.008,68.249
  region: 15.6,68.38 15.633,68.38 15.633,68.347 15.764,68.347 15.764,68.118 15.665,68.118 15.665,68.314 15.633,68.314 15.633,68.281 15.6,68.281 15.6,68.118 15.502,68.118 15.502,68.281 15.436,68.281 15.436,68.118 15.108,68.118 15.108,68.249 15.338,68.249 15.338,68.281 15.108,68.281 15.108,68.347 15.141,68.347 15.141,68.38 15.371,68.38 15.371,68.347 15.436,68.347 15.436,68.314 15.469,68.314 15.469,68.347 15.502,68.347 15.502,68.412 15.534,68.412 15.534,68.445 15.6,68.445 hole: 15.338,68.216 15.207,68.216 15.207,68.183 15.338,68.183
  region: 14.977,68.183 15.043,68.183 15.043,68.15 15.076,68.15 15.076,68.118 15.043,68.118 15.043,68.085 15.01,68.085 15.01,68.118 14.748,68.118 14.748,68.347 14.846,68.347 14.846,68.38 15.043,68.38 15.043,68.347 15.076,68.347 15.076,68.314 15.043,68.314 15.043,68.281 14.846,68.281 14.846,68.183 14.945,68.183
  region: 17.173,68.249 16.976,68.249 16.976,68.216 16.943,68.216 16.943,68.183 17.369,68.183 17.369,68.118 16.878,68.118 16.878,68.15 16.845,68.15 16.845,68.38 16.878,68.38 16.878,68.445 17.369,68.445 17.369,68.38 16.976,68.38 16.976,68.347 16.943,68.347 16.943,68.314 17.369,68.314 17.369,68.249 17.337,68.249 17.337,68.216 17.304,68.216 17.304,68.249 17.205,68.249
  region: 8.817,68.38 8.85,68.38 8.85,68.281 8.621,68.281 8.621,68.183 8.85,68.183 8.85,68.118 8.555,68.118 8.555,68.347 8.621,68.347 8.621,68.38 8.785,68.38
  region: 13.634,68.38 13.667,68.38 13.667,68.347 13.732,68.347 13.732,68.314 13.765,68.314 13.765,68.118 13.667,68.118 13.667,68.281 13.568,68.281 13.568,68.118 13.47,68.118 13.47,68.281 13.372,68.281 13.372,68.118 13.274,68.118 13.274,68.347 13.306,68.347 13.306,68.38 13.601,68.38
  region: 11.34,68.347 11.406,68.347 11.406,68.216 11.177,68.216 11.177,68.183 11.406,68.183 11.406,68.118 11.078,68.118 11.078,68.347 11.144,68.347 11.144,68.38 11.34,68.38 hole: 11.308,68.281 11.177,68.281 11.177,68.249 11.308,68.249
  region: 17.5,68.216 17.5,68.118 17.435,68.118 17.435,68.38 17.697,68.38 17.697,68.347 17.762,68.347 17.762,68.314 17.795,68.314 17.795,68.118 17.697,68.118 17.697,68.281 17.5,68.281 17.5,68.249
  region: 13.044,68.118 12.946,68.118 12.946,68.281 12.848,68.281 12.848,68.118 12.749,68.118 12.749,68.347 12.782,68.347 12.782,68.38 13.142,68.38 13.142,68.347 13.208,68.347 13.208,68.314 13.241,68.314 13.241,68.118 13.142,68.118 13.142,68.281 13.044,68.281 13.044,68.15
  region: 6.688,68.347 6.72,68.347 6.72,68.281 6.72,68.249 6.72,68.216 6.491,68.216 6.491,68.183 6.72,68.183 6.72,68.118 6.393,68.118 6.393,68.347 6.458,68.347 6.458,68.38 6.688,68.38 hole: 6.622,68.281 6.491,68.281 6.491,68.249 6.622,68.249
  region: 20.646,68.347 20.711,68.347 20.711,68.314 20.744,68.314 20.744,68.085 20.711,68.085 20.711,68.052 20.679,68.052 20.679,68.019 20.384,68.019 20.384,68.052 20.384,68.085 20.613,68.085 20.613,68.15 20.384,68.15 20.384,68.183 20.351,68.183 20.351,68.314 20.384,68.314 20.384,68.347 20.449,68.347 20.449,68.38 20.646,68.38 hole: 20.613,68.281 20.449,68.281 20.449,68.216 20.613,68.216
  region: 9.407,68.347 9.44,68.347 9.44,68.314 9.473,68.314 9.473,68.15 9.44,68.15 9.44,68.118 9.145,68.118 9.145,68.15 9.112,68.15 9.112,68.216 9.145,68.216 9.145,68.249 9.374,68.249 9.374,68.281 9.145,68.281 9.145,68.314 9.112,68.314 9.112,68.347 9.145,68.347 9.145,68.38 9.407,68.38 hole: 9.374,68.216 9.211,68.216 9.211,68.183 9.374,68.183
  region: 15.043,69.625 15.043,70.804 13.634,70.804 13.634,71.361 13.667,71.361 13.667,71.394 15.272,71.394 15.272,71.46 15.305,71.46 15.305,71.558 15.371,71.558 15.371,71.525 15.436,71.525 15.436,71.492 15.502,71.492 15.502,71.46 15.567,71.46 15.567,71.427 15.6,71.427 15.6,71.394 15.633,71.394 15.633,71.361 15.665,71.361 15.665,71.329 15.698,71.329 15.698,71.296 15.731,71.296 15.731,71.263 15.764,71.263 15.764,71.198 15.797,71.198 15.797,71.132 15.829,71.132 15.829,71.001 15.862,71.001 15.862,70.87 15.665,70.87 15.665,68.97 15.633,68.97 15.633,68.937 15.076,68.937 15.076,68.97 15.043,68.97 15.043,69.592
  region: 11.897,68.347 11.93,68.347 11.93,68.216 11.701,68.216 11.701,68.183 11.93,68.183 11.93,68.118 11.602,68.118 11.602,68.281 11.602,68.314 11.602,68.347 11.668,68.347 11.668,68.38 11.897,68.38 hole: 11.832,68.281 11.701,68.281 11.701,68.249 11.832,68.249
  region: 6.851,68.347 6.851,68.38 7.081,68.38 7.081,68.347 7.146,68.347 7.146,68.412 7.179,68.412 7.179,68.445 7.245,68.445 7.245,68.38 7.277,68.38 7.277,68.347 7.31,68.347 7.31,68.314 7.277,68.314 7.277,68.281 7.245,68.281 7.245,68.118 7.146,68.118 7.146,68.281 7.114,68.281 7.114,68.314 7.081,68.314 7.081,68.281 6.851,68.281 6.851,68.183 7.081,68.183 7.081,68.118 6.786,68.118 6.786,68.347 6.819,68.347
  region: 14.584,68.183 14.584,68.118 14.486,68.118 14.486,68.281 14.289,68.281 14.289,68.118 14.191,68.118 14.191,68.347 14.224,68.347 14.224,68.38 14.486,68.38 14.486,68.347 14.551,68.347 14.551,68.281 14.584,68.281 14.584,68.216
  region: 19.466,68.347 19.499,68.347 19.499,68.216 19.27,68.216 19.27,68.183 19.499,68.183 19.499,68.118 19.171,68.118 19.171,68.347 19.237,68.347 19.237,68.38 19.466,68.38 hole: 19.401,68.281 19.27,68.281 19.27,68.249 19.401,68.249
  region: 20.056,68.183 20.056,68.118 19.958,68.118 19.958,68.38 20.22,68.38 20.22,68.347 20.285,68.347 20.285,68.314 20.318,68.314 20.318,68.118 20.22,68.118 20.22,68.281 20.056,68.281 20.056,68.216
  region: 10.882,68.38 10.882,68.347 10.849,68.347 10.849,68.118 10.751,68.118 10.751,68.38 10.554,68.38 10.554,68.445 11.078,68.445 11.078,68.38 10.914,68.38
  region: 15.502,71.624 15.436,71.624 15.436,71.656 15.371,71.656 15.371,71.755 15.403,71.755 15.403,71.853 15.436,71.853 15.436,71.918 15.469,71.918 15.469,71.951 15.534,71.951 15.534,71.918 15.633,71.918 15.633,71.886 15.698,71.886 15.698,71.853 15.764,71.853 15.764,71.82 15.797,71.82 15.797,71.787 15.862,71.787 15.862,71.755 15.895,71.755 15.895,71.722 15.928,71.722 15.928,71.689 15.96,71.689 15.96,71.656 15.993,71.656 15.993,71.624 16.026,71.624 16.026,71.591 16.059,71.591 16.059,71.558 16.091,71.558 16.091,71.525 16.124,71.525 16.124,71.46 16.157,71.46 16.157,71.427 16.19,71.427 16.19,71.361 16.222,71.361 16.222,71.296 16.255,71.296 16.255,71.198 16.288,71.198 16.288,71.067 16.321,71.067 16.321,70.87 15.993,70.87 15.993,71.001 15.96,71.001 15.96,71.132 15.928,71.132 15.928,71.198 15.895,71.198 15.895,71.263 15.862,71.263 15.862,71.329 15.829,71.329 15.829,71.361 15.797,71.361 15.797,71.394 15.764,71.394 15.764,71.427 15.731,71.427 15.731,71.46 15.698,71.46 15.698,71.492 15.665,71.492 15.665,71.525 15.633,71.525 15.633,71.558 15.567,71.558 15.567,71.591 15.502,71.591
  region: 5.803,68.118 5.705,68.118 5.705,68.412 5.737,68.412 5.737,68.445 6.229,68.445 6.229,68.38 5.803,68.38 5.803,68.314 6.196,68.314 6.196,68.249 5.803,68.249 5.803,68.183 6.196,68.183 6.196,68.15 6.229,68.15 6.229,68.118 5.836,68.118
  region: 8.359,68.314 8.359,68.118 8.26,68.118 8.26,68.281 8.097,68.281 8.097,68.118 7.998,68.118 7.998,68.347 8.031,68.347 8.031,68.38 8.26,68.38 8.26,68.347 8.326,68.347 8.326,68.314
  region: 14.158,68.183 14.158,68.15 14.125,68.15 14.125,68.118 13.798,68.118 13.798,68.347 13.896,68.347 13.896,68.183 14.06,68.183 14.06,68.347 14.158,68.347 14.158,68.216
  region: 299 vertices and 0 holes, not listed, extent 6.458,69.002 13.208,71.46
  region: 17.205,70.804 17.205,71.067 17.238,71.067 17.238,71.165 17.271,71.165 17.271,71.198 17.304,71.198 17.304,71.23 17.337,71.23 17.337,71.263 17.369,71.263 17.369,71.296 17.402,71.296 17.402,71.329 17.435,71.329 17.435,71.361 17.5,71.361 17.5,71.394 17.599,71.394 17.599,71.427 17.828,71.427 17.828,71.46 20.679,71.46 20.679,70.87 17.828,70.87 17.828,70.837 17.795,70.837 17.795,69.625 17.828,69.625 17.828,69.592 20.679,69.592 20.679,69.559 20.711,69.559 20.711,69.035 20.679,69.035 20.679,69.002 17.828,69.002 17.828,69.035 17.599,69.035 17.599,69.068 17.5,69.068 17.5,69.101 17.435,69.101 17.435,69.133 17.402,69.133 17.402,69.166 17.369,69.166 17.369,69.199 17.337,69.199 17.337,69.232 17.304,69.232 17.304,69.264 17.271,69.264 17.271,69.297 17.238,69.297 17.238,69.395 17.205,69.395 17.205,70.772
  region: 5.672,71.067 5.672,71.099 5.705,71.099 5.705,71.198 5.737,71.198 5.737,71.263 5.77,71.263 5.77,71.296 5.803,71.296 5.803,71.329 5.836,71.329 5.836,71.361 5.901,71.361 5.901,71.394 5.967,71.394 5.967,71.427 6.032,71.427 6.032,71.46 6.163,71.46 6.163,71.492 9.145,71.492 9.145,70.935 6.36,70.935 6.36,70.903 6.294,70.903 6.294,70.87 6.262,70.87 6.262,69.69 6.294,69.69 6.294,69.658 6.327,69.658 6.327,69.625 9.178,69.625 9.178,69.068 6.131,69.068 6.131,69.101 5.999,69.101 5.999,69.133 5.934,69.133 5.934,69.166 5.868,69.166 5.868,69.199 5.836,69.199 5.836,69.232 5.803,69.232 5.803,69.264 5.77,69.264 5.77,69.297 5.737,69.297 5.737,69.363 5.705,69.363 5.705,69.428 5.672,69.428 5.672,69.625 5.639,69.625 5.639,70.935 5.672,70.935 5.672,71.034
  region: 12.061,68.118 11.996,68.118 11.996,68.347 12.061,68.347 12.061,68.38 12.291,68.38 12.291,68.281 12.061,68.281 12.061,68.183 12.291,68.183 12.291,68.118 12.094,68.118
  region: 15.993,71.82 15.96,71.82 15.96,71.853 15.928,71.853 15.928,71.886 15.862,71.886 15.862,71.918 15.829,71.918 15.829,71.951 15.764,71.951 15.764,71.984 15.698,71.984 15.698,72.017 15.6,72.017 15.6,72.05 15.502,72.05 15.502,72.115 15.534,72.115 15.534,72.213 15.567,72.213 15.567,72.246 15.665,72.246 15.665,72.213 15.731,72.213 15.731,72.181 15.829,72.181 15.829,72.148 15.895,72.148 15.895,72.115 15.928,72.115 15.928,72.082 15.993,72.082 15.993,72.05 16.059,72.05 16.059,72.017 16.091,72.017 16.091,71.984 16.124,71.984 16.124,71.951 16.157,71.951 16.157,71.918 16.222,71.918 16.222,71.886 16.255,71.886 16.255,71.853 16.288,71.853 16.288,71.787 16.321,71.787 16.321,71.755 16.354,71.755 16.354,71.722 16.386,71.722 16.386,71.689 16.419,71.689 16.419,71.624 16.452,71.624 16.452,71.591 16.485,71.591 16.485,71.525 16.517,71.525 16.517,71.46 16.55,71.46 16.55,71.394 16.583,71.394 16.583,71.296 16.616,71.296 16.616,71.165 16.648,71.165 16.648,70.87 16.452,70.87 16.452,71.067 16.419,71.067 16.419,71.198 16.386,71.198 16.386,71.296 16.354,71.296 16.354,71.394 16.321,71.394 16.321,71.46 16.288,71.46 16.288,71.492 16.255,71.492 16.255,71.558 16.222,71.558 16.222,71.591 16.19,71.591 16.19,71.624 16.157,71.624 16.157,71.689 16.124,71.689 16.124,71.722 16.091,71.722 16.091,71.755 16.059,71.755 16.059,71.787 15.993,71.787
Bottom Layer:
  region net +12: 21.463,20.574 18.669,20.574 18.669,10.795 18.542,10.668 15.494,10.668 15.494,7.493 15.113,7.112 7.366,7.112 7.366,4.191 23.622,4.191 26.289,1.524 34.163,1.524 34.163,3.81 25.654,3.81 23.749,5.715 23.749,10.668 22.86,10.668 21.463,12.065

## Silkscreen, mask and mechanical layers (free items; w line width, h text height)
Top Overlay:
Mechanical 13:
  lines w0.254: 50.673,74.803 0.127,74.803 0.127,0.127 50.673,0.127 50.673,74.803 ; 50.673,74.803 50.673,74.803

## Text inside footprints (layer, text, board x,y; h text height)
C6: Top Overlay "+" at 17.158,47.523 h1.5
C8: Top Overlay "+" at 11.147,12.167 h1.5 r180
C9: Top Overlay "+" at 11.147,6.325 h1.5 r180
C10: Top Overlay "+" at 41.484,28.042 h1.5 r180